# Altium PCB PCB1.PcbDoc
Units mil, origin at the board's own origin, x right, y up, seen from the top; angles counter-clockwise.
Board outline 6000 x 4000 mil, 2 copper layers (Top Layer, Bottom Layer); 11 components, 7 nets, 23 pads, 0 vias.
Unrouted connection lines stored in the file: 16.
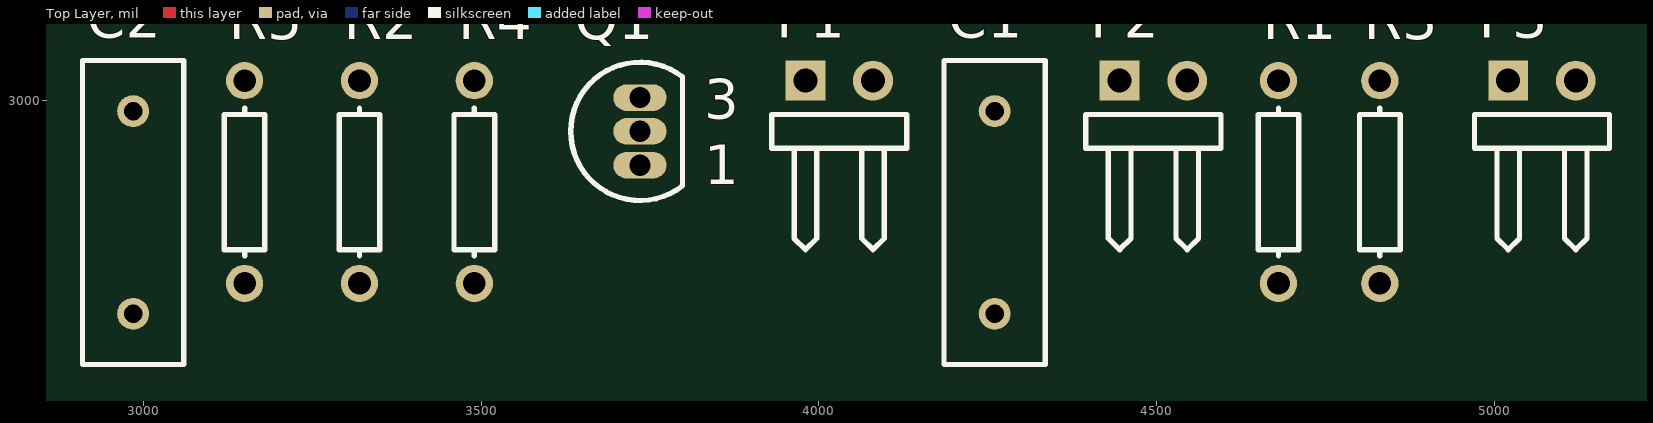
[diagram p0: Top Layer view]
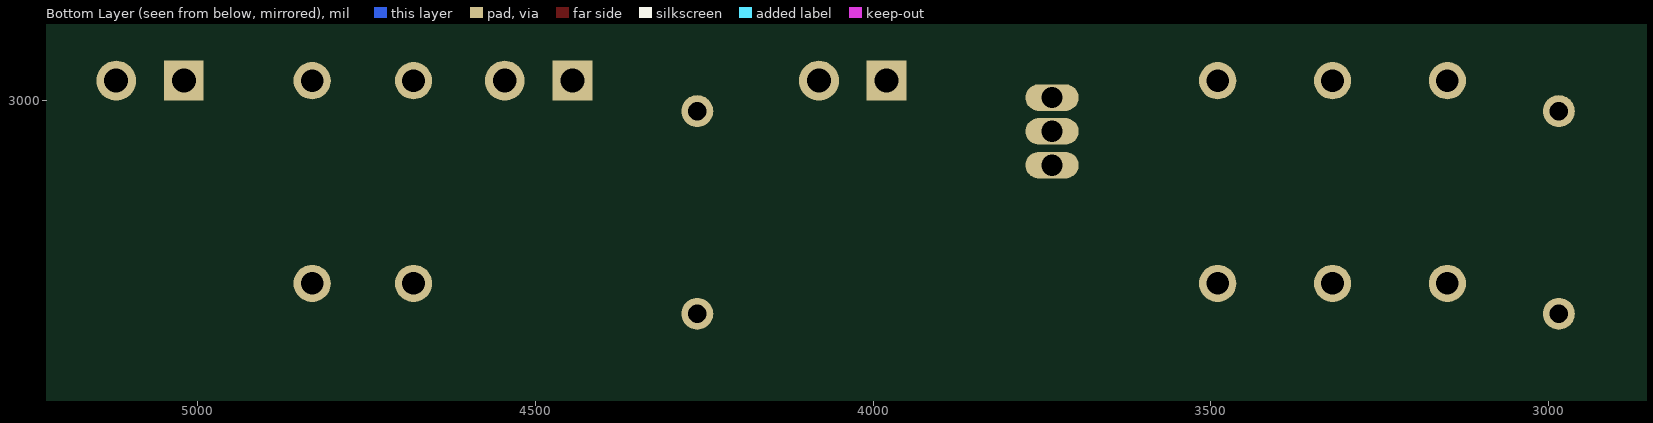
[diagram p1: Bottom Layer view, seen from below]

## Layer stack, top to bottom
Top Solder: solder mask 0.4, Solder Resist, Dk 3.5
Top Layer: signal copper 1.4
Dielectric 1: dielectric 12.6, FR-4, Dk 4.8
Bottom Layer: signal copper 1.4
Bottom Solder: solder mask 0.4, Solder Resist, Dk 3.5

## Board outline
1000,1000 7000,1000 7000,5000 1000,5000

## Design rules (kind name [scope] priority, off if disabled: settings)
Clearance [All] p1: gap=10
PolygonConnect [All] p1: connectstyle=Relief reliefconductorwidth=10 reliefentries=4 polygonreliefangle="90 Angle" airgapwidth=10
RoutingVias [All] p1: holewidth=28 width=50 viastyle="Through Hole" minholewidth=28 minwidth=50 maxholewidth=28 maxwidth=50
SolderMaskExpansion [All] p1: expansion=4
Width [All] p1: maxlimit=10 minlimit=10 preferedwidth=10
30 further rules are at their usual default settings.

## Components (designator, comment, footprint, x,y, rotation, side; value= is the part's Value field where it differs from the comment)
C1 "Cap" RAD-0.3 4260,2835 r90 top
C2 "Cap" RAD-0.3 2985,2835 r90 top
P1 "Header 2H" HDR1X2H 3980,3030 r0 top
P2 "Header 2H" HDR1X2H 4445,3030 r0 top
P3 "Header 2H" HDR1X2H 5020,3030 r0 top
Q1 "BC548C" 29-04 3735,2955 r0 top
R1 "Res1" AXIAL-0.3 4680,2880 r90 top
R2 "Res1" AXIAL-0.3 3320,2880 r90 top
R3 "Res1" AXIAL-0.3 4830,2880 r90 top
R4 "Res1" AXIAL-0.3 3490,2880 r90 top
R5 "Res1" AXIAL-0.3 3150,2880 r90 top

## Footprints (in the part's own frame and the unit in brackets; to place one, negate y for a bottom-side part, rotate by r counter-clockwise, add the part's x,y. Pads: shape width x height; smd on the part's side, far side on the other; paste and mask are expansions set on the pad)
29-04 [mm] "TO, Flat Index; 3 In-Line, Axial Leads; Body Dia. 4.8mm; Leads 0.48 x 0.5 mm (max)"
  oval 2x1 hole 0.8: 1(0,-1.27) 2(0,0) 3(0,1.27)
  silkscreen extent -2.6,-2.6 1.6,2.6
AXIAL-0.3 [mm] "Axial Device, Thru-Hole; 2 Leads; 0.3 in Pin Spacing"
  round 1.4 hole 0.85: 1(-3.81,0) 2(3.81,0)
  silkscreen extent -2.77,-0.76 2.77,0.76
HDR1X2H [mm] "Connector; Header; 2 Position; Right Angle"
  rect 1.5x1.5 hole 0.9: 1(0,0)
  round 1.5 hole 0.9: 2(2.54,0)
  silkscreen extent -1.27,-6.35 3.81,-1.27
RAD-0.3 [mm] "Radial Cap, Thru-Hole; 2 Leads; 0.3 in Pin Spacing"
  round 1.2 hole 0.7: 1(-3.81,0) 2(3.81,0)
  silkscreen extent -5.71,-1.91 5.71,1.91

## Part data
C1 C2: "Capacitor"
P1 P2 P3: "Header, 2-Pin, Right Angle"
Q1: "Amplifier Transistor NPN Silicon"
R1 R2 R3 R4 R5: "Resistor"

## Nets (pads, with @x,y where several pads share a name; then routed paths per layer and width w, separated by ;. In a path a pad name is that pad's centre, name@x,y a point inside that pad or via, vN(x,y) a via of type N, cw(c..) or ccw(c..) an arc to the next point about the centre after c; other vN are vias at no path point)
GND: C2.1 P1.2 P2.2 P3.2 R2.1 R5.1
NetC1_1: C1.1 P1.1
NetC1_2: C1.2 Q1.2 R1.1 R2.2
NetC2_2: C2.2 R4.1 R5.2
NetQ1_3: Q1.3 R4.2
VCC: P3.1 R1.2 R3.2
VOUT: P2.1 Q1.1 R3.1

## Text inside footprints (layer, text, board x,y; h text height)
Q1: Top Overlay "3" at 3830.32,2973.39 h59.05; Top Overlay "1" at 3830.32,2877.09 h59.05